# Altium PCB Multi-sensor Datalogger.PcbDoc
Units mm, origin at the board's own origin, x right, y up, seen from the top; angles counter-clockwise.
Board outline 100.58 x 93.85 mm, 2 copper layers (Top Layer, Bottom Layer); 51 components, 45 nets, 209 pads, 49 vias.
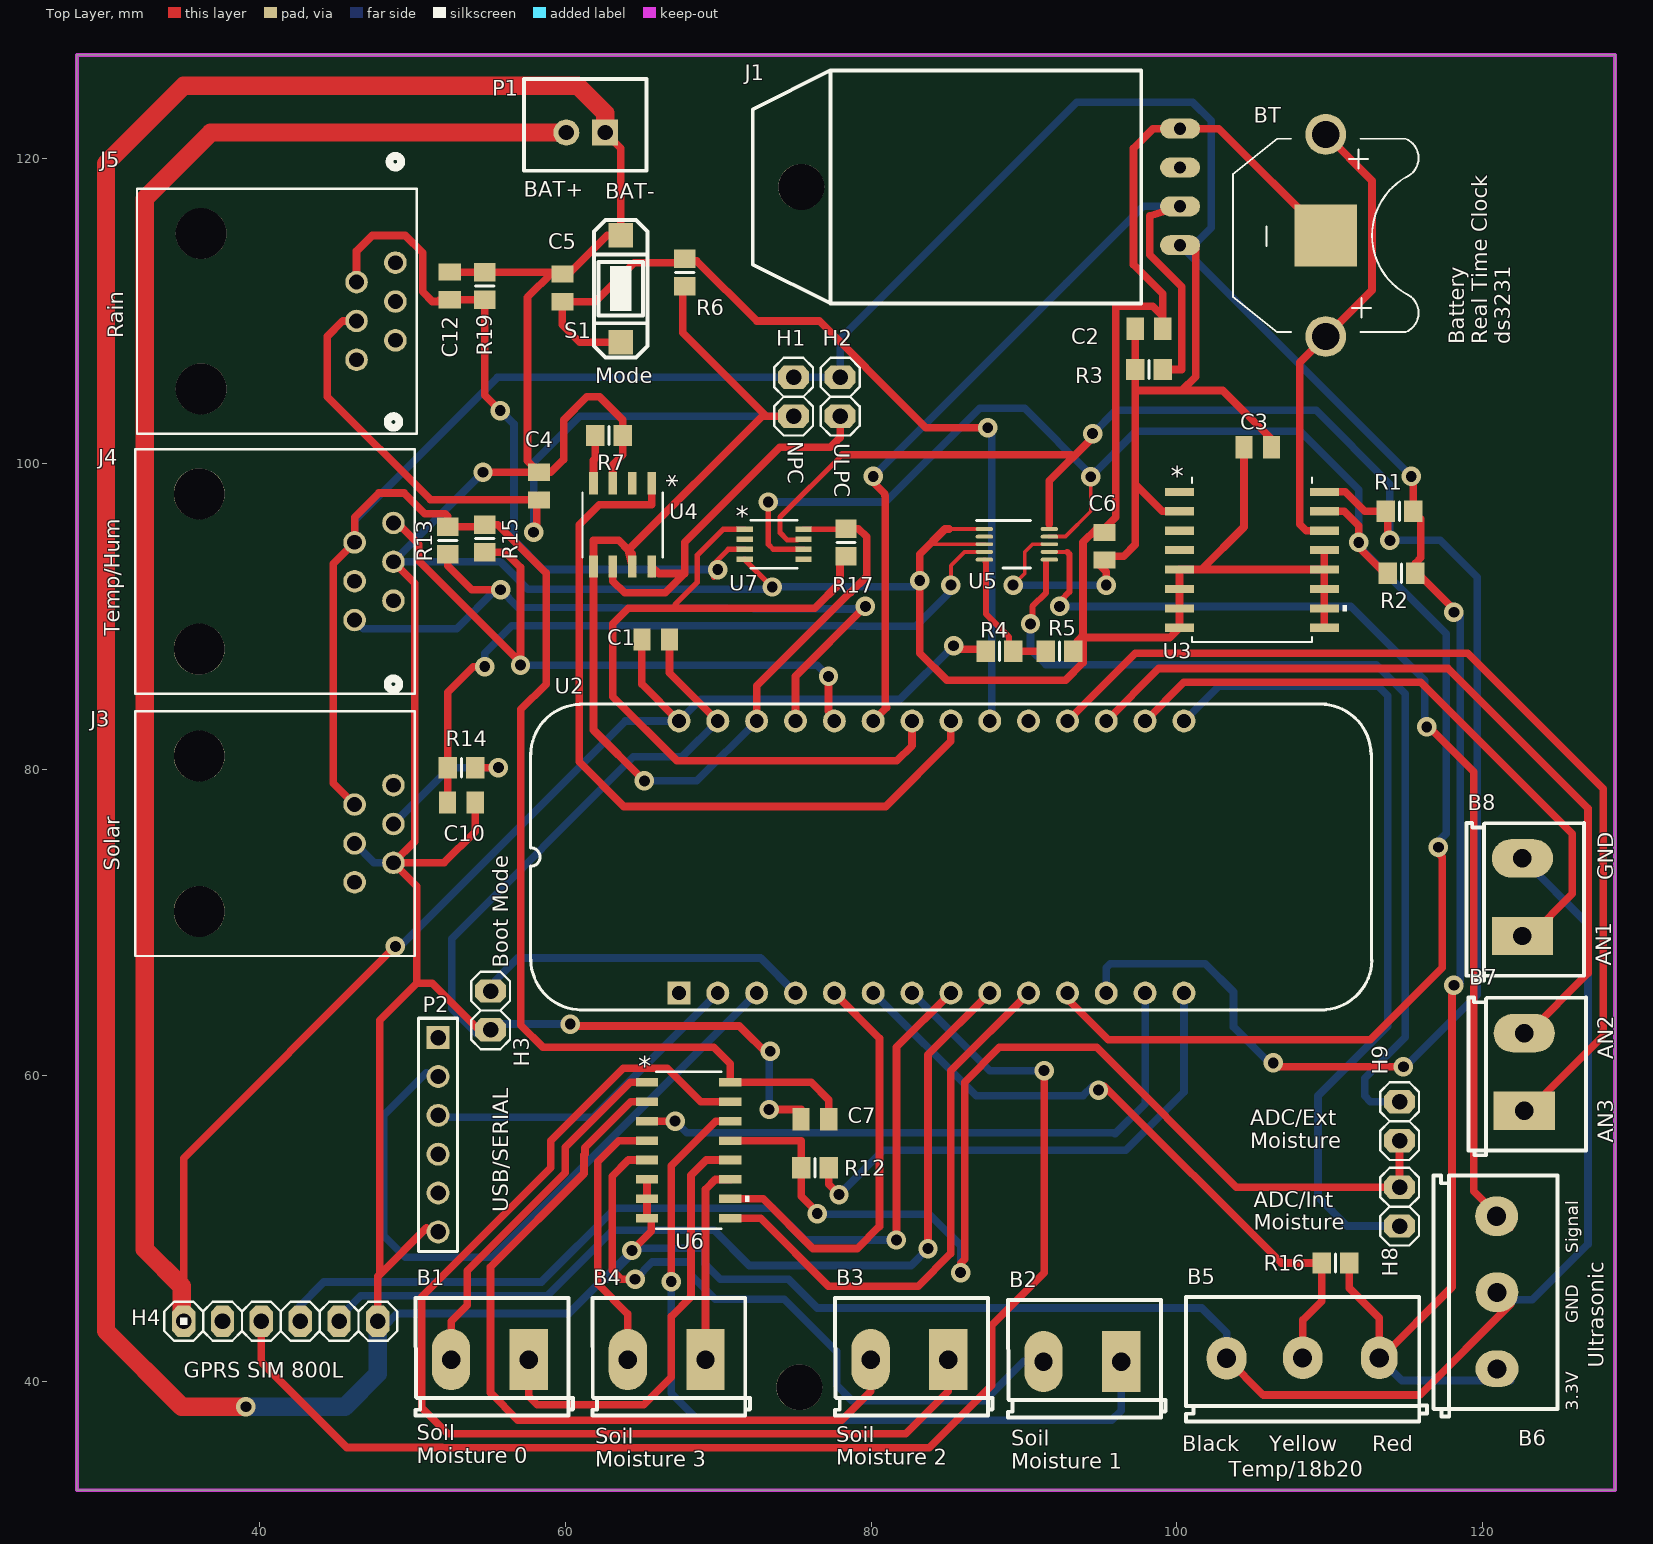
[diagram p0: Top Layer view]
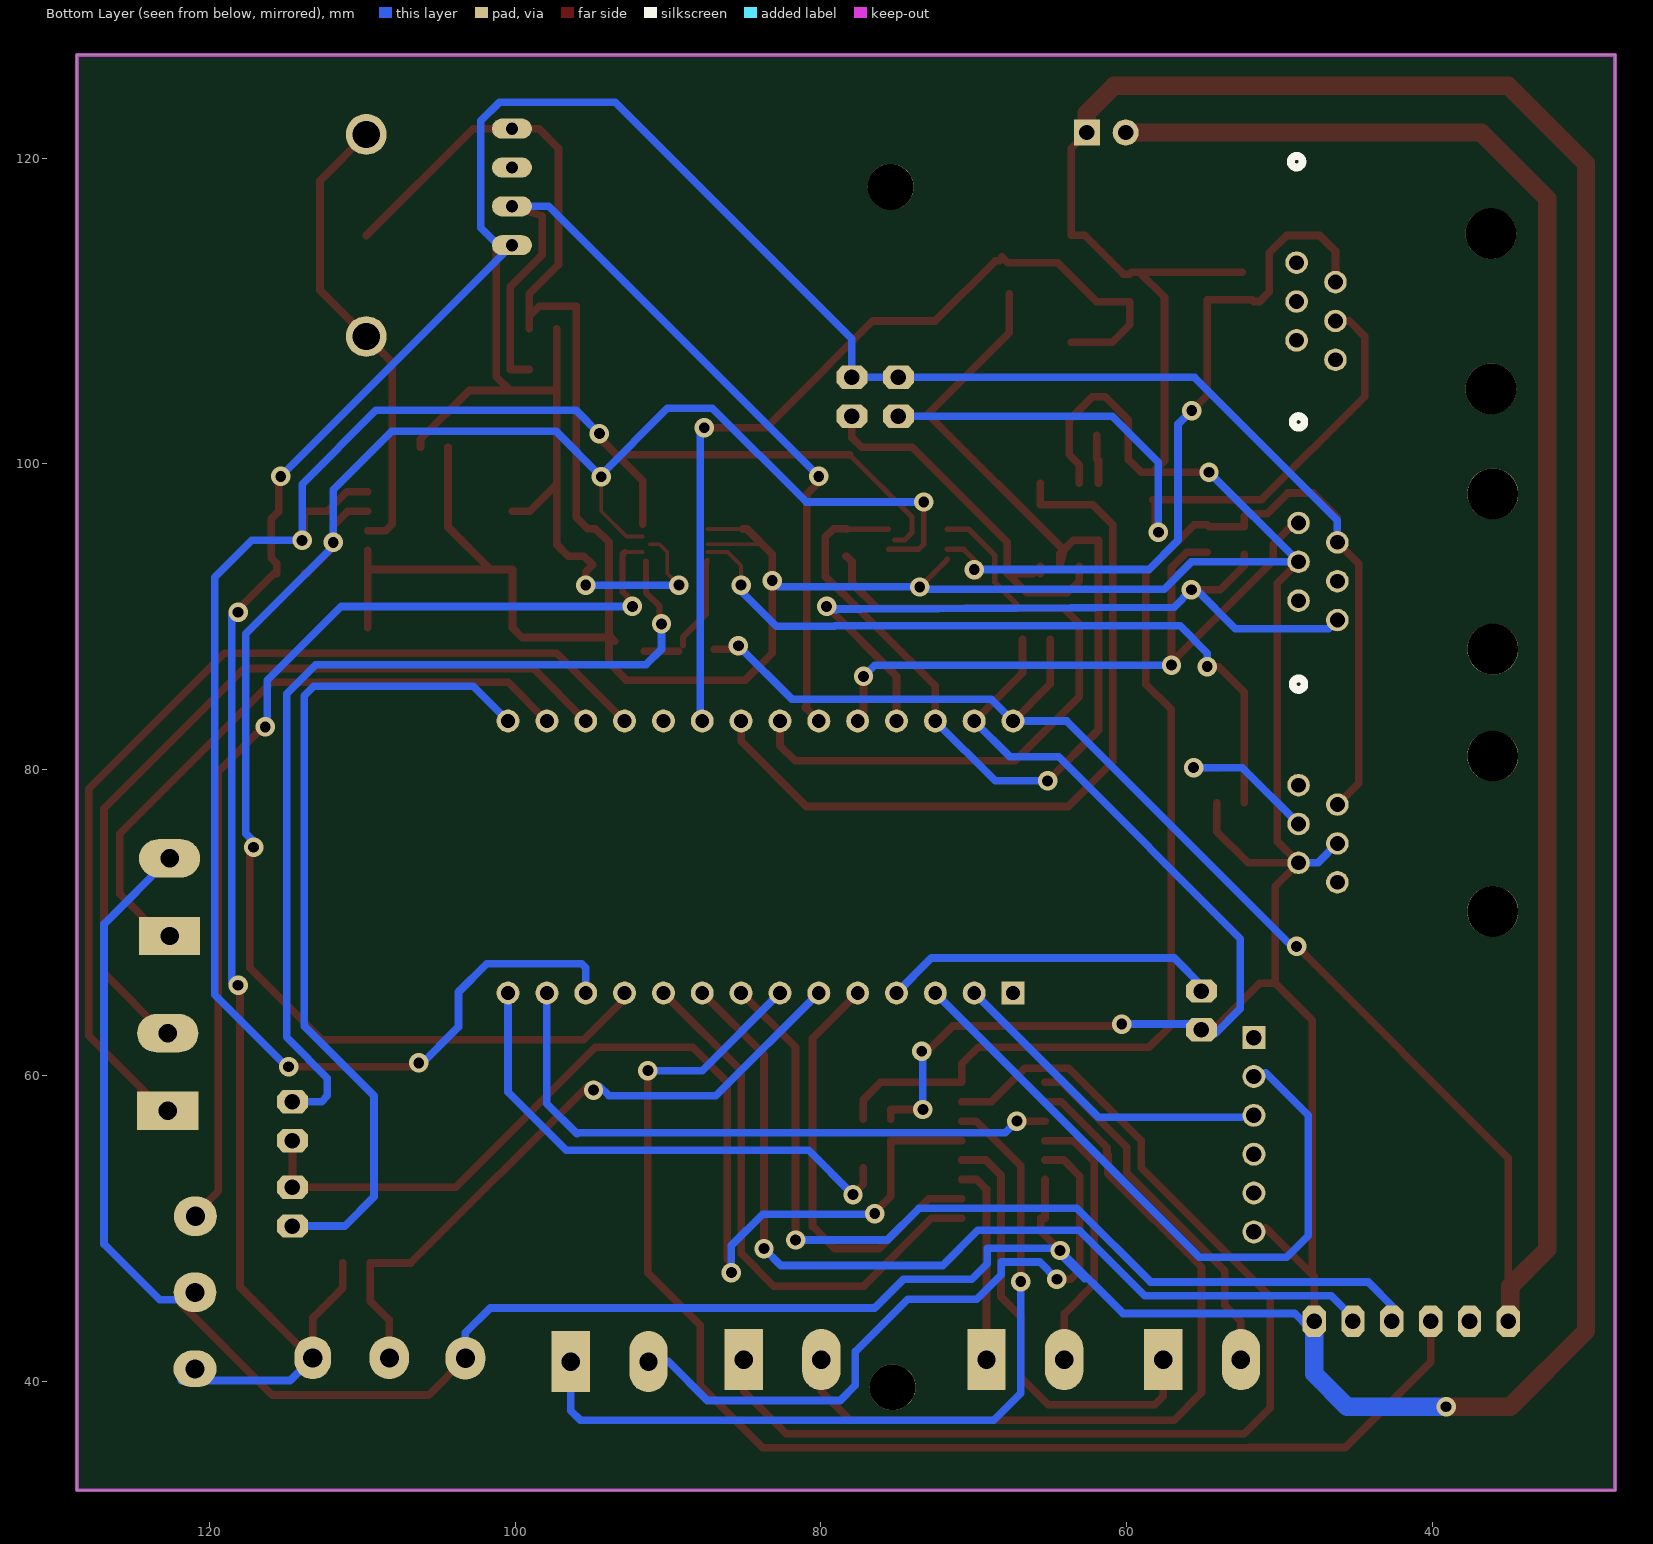
[diagram p1: Bottom Layer view, seen from below]

## Layer stack, top to bottom
Top Solder: solder mask 0.0102, Solder Resist, Dk 3.5
Top Layer: signal copper 0.0356
Dielectric 1: dielectric 0.32, FR-4, Dk 4.8
Bottom Layer: signal copper 0.0356
Bottom Solder: solder mask 0.0102, Solder Resist, Dk 3.5

## Board outline
28.067,32.893 28.067,126.746 128.651,126.746 128.651,32.893

## Design rules (kind name [scope] priority, off if disabled: settings)
Clearance [All] p1: gap=0.4 except(0.7: Arc-Poly Track-Poly SMDPad-Poly THPad-Poly Via-Poly Fill-Poly Poly-Poly)
PolygonConnect [All] p1: connectstyle=Relief reliefconductorwidth=0.254 reliefentries=4 polygonreliefangle="90 Angle" airgapwidth=0.254
RoutingVias [All] p1: holewidth=0.711 width=1.27 viastyle="Through Hole" minholewidth=0.711 minwidth=1.27 maxholewidth=0.711 maxwidth=1.27
SolderMaskExpansion [All] p1: expansion=0.102
Width [All] p1: maxlimit=1.2 minlimit=0.25 preferedwidth=0.5 minimp=50.000000 maximp=50.000000 favimp=50.000000
30 further rules are at their usual default settings.

## Classes and differential pairs
component class "Multi-sensor Datalogger": BT C1 C2 C3 C4 C5 C6 C7 H1 H2 H3 H4 H8 H9 J1 P1 P2 R1 R2 R3 R4 R5 R6 R7 R12 R17 S1 U2 U3 U4 U5 U6 U7
component class Connectors: B1 B2 B3 B4 B5 B6 B7 B8 C10 C12 J3 J4 J5 R13 R14 R15 R16 R19

## Components (designator, comment, footprint, x,y, rotation, side; value= is the part's Value field where it differs from the comment)
B1 "Borne" BORNE2 55.118,41.402 r180 top
B2 "Borne" BORNE2 93.853,41.275 r180 top
B3 "Borne" BORNE2 82.55,41.402 r180 top
B4 "Borne" BORNE2 66.675,41.402 r180 top
B5 "Borne 3" BORNE3 113.284,41.275 r180 top
B6 "Borne 3" BORNE3 120.65,40.767 r90 top
B7 "Borne" BORNE2 122.682,60.198 r90 top
B8 "Borne" BORNE2 122.555,71.628 r90 top
BT "BK-5091" BAT_BK-5091 109.728,114.935 r270 top
C1 "08055C104KAT2A" CAP_X7R_0805_AVX 65.913,88.519 r180 top
C2 "08055C104KAT2A" CAP_X7R_0805_AVX 98.171,108.839 r180 top
C3 "08055C104KAT2A" CAP_X7R_0805_AVX 105.283,101.092 r0 top
C4 "08055C104KAT2A" CAP_X7R_0805_AVX 58.293,98.552 r90 top
C5 "08055C104KAT2A" CAP_X7R_0805_AVX 59.817,111.506 r270 top
C6 "08055C104KAT2A" CAP_X7R_0805_AVX 95.25,94.615 r270 top
C7 "08055C104KAT2A" CAP_X7R_0805_AVX 76.327,57.15 r0 top
C10 "" CAP_X7R_0805_AVX 53.213,77.851 r0 top
C12 "" CAP_X7R_0805_AVX 52.451,111.633 r270 top
H1 "Header" "Header 1X2" 74.93,103.124 r90 top
H2 "Header" "Header 1X2" 77.978,103.124 r90 top
H3 "Header" "Header 1X2" 55.118,62.992 r90 top
H4 "Header 6" "Header 1X6" 42.672,43.942 r180 top
H8 "Header" "Header 1X2" 114.554,50.165 r90 top
H9 "Header" "Header 1X2" 114.554,58.293 r270 top
J1 "DHT22" DHT22 100.203,118.11 r90 top
J3 "RJ11-6N-B" CONN_RJ11-6N-B_TEC 48.768,78.994 r270 top
J4 "RJ11-6N-B" CONN_RJ11-6N-B_TEC 48.768,96.139 r270 top
J5 "RJ11-6N-B" CONN_RJ11-6N-B_TEC 48.895,113.157 r270 top
P1 "Header 2" BORNERA25-2 62.611,121.666 r180 top
P2 "Header 6" HDR1X6 51.689,62.484 r270 top
R1 "Res1" 6-0805_N 114.554,96.901 r180 top
R2 "Res2" 6-0805_N 114.681,92.837 r180 top
R3 "Res3" 6-0805_N 98.171,106.172 r180 top
R4 "Res4" 6-0805_N 88.392,87.757 r0 top
R5 "Res5" 6-0805_N 92.329,87.757 r0 top
R6 "Res1" 6-0805_N 67.818,112.522 r90 top
R7 "" 6-0805_N 62.865,101.854 r180 top
R12 "Res3" 6-0805_N 76.327,53.975 r0 top
R13 "Res" 6-0805_N 52.324,94.996 r270 top
R14 "Res" 6-0805_N 53.213,80.137 r180 top
R15 "Res" 6-0805_N 54.737,95.123 r270 top
R16 "Res" 6-0805_N 110.363,47.752 r180 top
R17 "Res3" 6-0805_N 78.359,94.869 r270 top
R19 "Res" 6-0805_N 54.737,111.633 r90 top
S1 "SW-PB" BUTTON-1-SMD 63.627,107.696 r180 top
U2 "LoPy" LoPy 83.947,74.295 r0 top
U3 "ds3231s#" 21-0042B_16_MXM 104.902,93.726 r0 top
U4 "MIC2545A-2YM-TR" SOP-8_MCH 63.754,96.012 r270 top
U5 "ADS1115IDGSR" DGS0010A_L 89.535,94.742 r0 top
U6 "CD74HC4052MG4" D16_TEX 68.072,55.118 r0 top
U7 "S-35770E01I-K8T2U" TMSOP08_2P9X2P8_ABL 73.66,94.742 r0 top

## Footprints (in the part's own frame and the unit in brackets; to place one, negate y for a bottom-side part, rotate by r counter-clockwise, add the part's x,y. Pads: shape width x height; smd on the part's side, far side on the other; paste and mask are expansions set on the pad)
6-0805_N [mm] "Chip Resistor, Body 2.0x1.2mm, IPC Medium Density"
  rect 1.2x1.4 smd: 1(-0.9,0) 2(0.9,0)
  silkscreen extent 0,-0.6 0,0.6, body extent -1.07,-0.7 1.07,0.7, height 0.7
21-0042B_16_MXM [mil]
  rect 74x21 smd paste+0 mask+0: 1(-186.5,175) 2(-186.5,125) 3(-186.5,75) 4(-186.5,25) 5(-186.5,-25) 6(-186.5,-75) 7(-186.5,-125) 8(-186.5,-175) 9(186.5,-175) 10(186.5,-125) 11(186.5,-75) 12(186.5,-25) 13(186.5,25) 14(186.5,75) 15(186.5,125) 16(186.5,175)
  silkscreen extent -154,-212 244,212, body extent -209,-210 209,203, height 104
BAT_BK-5091 [mm]
  round 2.67 hole 1.78: 1+(-6.605,0) 2+(6.605,0)
  rect 4.06x4.06 smd: NEG(0,0)
  silkscreen extent -6.33,-6.07 6.33,6.07, body extent -9.63,-6.99 9.37,5.59, height 3.22
BORNE2 [mm] "Terminal atornillable 2 salidas"
  rect 2.5x4 hole 1.2: 1(-2.501,-0.028)
  oval 2.5x4 hole 1.2: 2(2.579,-0.028)
  silkscreen extent -5.4,-4.06 4.9,3.62, body extent -5.51,-3.97 4.99,3.73, height 10
BORNE3 [mm] "Terminal atornillable 3 salidas"
  oval 2.4x2.8 hole 1.25: 1(0.06,-0.275)
  oval 2.6x2.8 hole 1.25: 2(5.065,-0.275) 3(10.04,-0.25)
  silkscreen extent -3.06,-4.24 12.7,3.89, body extent -2.45,-4.28 12.55,3.72, height 10
BORNERA25-2 [mm]
  rect 1.7x1.7 hole 1: 1(0,0)
  round 1.7 hole 1: 2(2.54,0)
  silkscreen extent -2.7,-3.5 5.3,2.5, body extent -1.29,-3.22 3.79,2.62, height 10.1
BUTTON-1-SMD [mm]
  rect 1.6x1.6 smd: 1(0,-0.25) 2(0,-7.25)
  silkscreen extent -1.75,-8.25 1.75,0.75, body extent -1.8,-7.75 1.8,0.25, height 2.5
CAP_X7R_0805_AVX [mil]
  rect 44x57 smd paste+0 mask+0: 1(-35.5,0) 2(35.5,0)
  body extent -44,-29 44,29, height 37
CONN_RJ11-6N-B_TEC [mil]
  round 58 hole 38 mask+0: 1(0,0) 2(50,-100) 3(100,0) 4(150,-100) 5(200,0) 6(250,-100)
  round 131 hole 131 unplated: 7(-75,-500) 8(325,-500)
  silkscreen extent -275,-665 440,55, body extent -183,-600 433,49, height 613
D16_TEX [mil]
  rect 57.5x22 smd paste+0 mask+0: 1(-107.25,175) 2(-107.25,125) 3(-107.25,75) 4(-107.25,25) 5(-107.25,-25) 6(-107.25,-75) 7(-107.25,-125) 8(-107.25,-175) 9(107.25,-175) 10(107.25,-125) 11(107.25,-75) 12(107.25,-25) 13(107.25,25) 14(107.25,75) 15(107.25,125) 16(107.25,175)
  silkscreen extent -84,-202 156,202, body extent -122,-197 122,197, height 69
DGS0010A_L [mm]
  oval 1.15x0.25 smd paste+0 mask+0.051: 1(-2.125,1) 2(-2.125,0.5) 3(-2.125,0) 4(-2.125,-0.5) 5(-2.125,-1) 6(2.125,-1) 7(2.125,-0.5) 8(2.125,0) 9(2.125,0.5) 10(2.125,1)
  silkscreen extent -2.65,-1.55 0.9,1.55, body extent -2.46,-1.5 2.46,1.5, height 0.41
DHT22 [mm]
  oval 1.308x2.616 hole 0.8: DATA(-1.27,0) GND(3.81,0) NC(1.27,0) VDD(-3.81,0)
  round 3 hole 3 unplated: ""(0,24.765)
  silkscreen extent -7.62,2.54 7.62,27.94, body extent -7.73,-0.57 7.37,29.78, height 7.73
HDR1X6 [mm] "Connector; Header; 6 Position"
  rect 1.5x1.5 hole 1: 1(0,0)
  round 1.5 hole 1: 2(2.54,0) 3(5.08,0) 4(7.62,0) 5(10.16,0) 6(12.7,0)
  silkscreen extent -1.27,-1.27 13.97,1.27
"Header 1X2" [mil] "Conector Header 1 linea 2 terminales"
  oct 60x80 hole 40: 1(0,0) 2(100,0)
  silkscreen extent -50,-50 150,50, body extent -50,-49 150,49, height 341
"Header 1X6" [mil] "Conector Header 1 linea 6 terminales"
  oct 60x80 hole 40: 1(-200,0) 2(-100,0) 3(0,0) 4(100,0) 5(200,0) 6(300,0)
  silkscreen extent -250,-50 350,50, body extent -250,-48 350,50, height 344
LoPy [mm] "DIP, Plastic; 28 Leads; Row Spacing 15.24 mm; Pitch 2.54 mm"
  rect 1.5x1.5 hole 0.9: 1(-16.51,-8.89)
  round 1.5 hole 0.9: 2(-13.97,-8.89) 3(-11.43,-8.89) 4(-8.89,-8.89) 5(-6.35,-8.89) 6(-3.81,-8.89) 7(-1.27,-8.89) 8(1.27,-8.89) 9(3.81,-8.89) 10(6.35,-8.89) 11(8.89,-8.89) 12(11.43,-8.89) 13(13.97,-8.89) 14(16.51,-8.89) 15(16.51,8.89) 16(13.97,8.89) 17(11.43,8.89) 18(8.89,8.89) 19(6.35,8.89) 20(3.81,8.89) 21(1.27,8.89) 22(-1.27,8.89) 23(-3.81,8.89) 24(-6.35,8.89) 25(-8.89,8.89) 26(-11.43,8.89) 27(-13.97,8.89) 28(-16.51,8.89)
  silkscreen extent -26.21,-10 28.8,10, body extent -26.61,-10.03 28.64,10.29, height 6.2
SOP-8_MCH [mil]
  rect 57.5x22 smd paste+0 mask+0: 1(-107.25,75) 2(-107.25,25) 3(-107.25,-25) 4(-107.25,-75) 5(107.25,-75) 6(107.25,-25) 7(107.25,25) 8(107.25,75)
  silkscreen extent -84,-104 84,104, body extent -117,-98 127,99, height 69
TMSOP08_2P9X2P8_ABL [mil]
  rect 41.5x14 smd paste+0 mask+0: 1(-75.75,38.39) 2(-75.75,12.8) 3(-75.75,-12.8) 4(-75.75,-38.39) 5(75.75,-38.39) 6(75.75,-12.8) 7(75.75,12.8) 8(75.75,38.39)
  silkscreen extent -60,-62 60,62, body extent -83,-55 83,59, height 32

## Part data
B1 B2 B3 B4 B7 B8: library part Borne2, "Terminal Atornillable 2 salidas"
B5 B6: library part Borne3, "Terminal atornillable 3 salidas"
BT: "Battery Retainer Coin, 11.6mm 1 Cell PC Pin"
C1 C2 C3 C4 C5 C6 C7 J3 J4 J5 U3 U4 U5 U6 U7: "No Description Available"
C10 C12: library part "Capacitor ceramico", "Capacitor ceramico"
H1 H2 H3 H8 H9: library part "Header 2", "Header 2 pin"
H4 P2: "Header, 6-Pin"
J1: "Capacitive-type humidity and temperature module/sensor"
P1: "Header, 2-Pin"
R1 R6: "Resistor"
R2 R3 R4 R5 R7 R12 R17: library part Res1, "Resistor"
R13 R14 R15 R16 R19: library part "Resistor 1/4 watt", "Resistor empaque ceramico axial de 1/4 de watt"
S1: "Switch"
U2: "LoPy, Wifi and Bluetooth Microcontroller, 4M RAM, 4 MHz, 28-Pin, 3.0 to 5.5V Supply Range, Commercial Temperature"

## Free pads (board coordinates)
  round 3 hole 3: 2(75.311,39.624)

## Via types
v1: diameter 1.27, hole 0.711, Top Layer to Bottom Layer, 49 vias

## Nets (pads, with @x,y where several pads share a name; then routed paths per layer and width w, separated by ;. In a path a pad name is that pad's centre, name@x,y a point inside that pad or via, vN(x,y) a via of type N, cw(c..) or ccw(c..) an arc to the next point about the centre after c; other vN are vias at no path point)
3.3V: C4.1 H1.1 J5.4 R6.1 R17.1 U2.26 U4.5 U4.7 U7.8 | length 123.2
  Top Layer w0.35: U7.8 R17.1@78.307,95.717
  Top Layer w0.5: J5.4 45.466,109.347 44.45,108.331 44.45,104.394 51.194,97.65 C4.1@58.141,97.65 ; v1(57.937,95.529) 58.141,95.733 C4.1@58.141,97.65 ; C4.1 C4.1@58.141,97.65 ; v1(65.176,79.273) 61.849,82.601 U4.5 61.849,94.996 63.5,94.996 64.127,94.369 ; R6.1@67.691,111.125 67.691,108.585 73.152,103.124 72.883,103.124 ; U2.26 72.517,85.488 78.607,91.578 78.65,91.578 79.709,92.637 79.709,95.225 79.165,95.769 R17.1 R17.1@78.307,95.717 ; H1.1 72.883,103.124 ; 64.127,94.369 64.389,94.107 U4.7 64.127,94.369 ; 64.127,94.369 72.883,103.124
  Bottom Layer w0.5: v1(57.937,95.529) 57.937,100.101 60.96,103.124 H1.1 ; v1(65.176,79.273) 68.605,79.273 U2.26
"3.3V OUT MIC2545": H2.1 U4.6 U4.8 | length 25.7
  Top Layer w0.5: U4.6 63.119,92.329 63.881,91.567 66.548,91.567 67.818,92.837 ; U4.8@65.659,92.837 U4.8 66.11,92.837 67.818,92.837 ; H2.1 77.978,101.727 77.75,101.499 77.747,101.499 77.34,101.092 74.041,101.092 67.818,94.869 67.818,92.837
"3.3V SENSORS": B5.1 B6.1 C2.2 C3.2 C6.2 C7.2 H1.2 H2.2 J1.VDD J3.2 J4.2 R1.1 R2.1 R3.2 R13.1 R15.1 R16.1 U3.2 U5.8 U6.16 | length 323
  Top Layer w0.25: v1(89.281,92.075) 90.043,92.837 90.043,94.234 90.551,94.742 U5.8@91.186,94.742
  Top Layer w0.5: J3.2 44.831,79.121 44.831,93.472 J4.2 46.228,96.52 47.803,98.095 49.476,98.095 50.821,96.75 52.144,96.75 52.324,96.571 R13.1 54.61,95.896 R15.1 55.59,96.023 58.75,92.862 58.75,85.598 57.099,83.947 57.099,63.297 58.547,61.849 69.723,61.849 70.796,60.776 U6.16 76.073,59.563 77.229,58.407 C7.2 ; v1(95.377,92.075) 95.377,92.951 94.932,93.396 95.504,93.967 96.507,93.967 97.271,94.731 97.271,98.679 ; C2.2 97.269,107.494 97.271,107.493 R3.2 97.271,104.8 ; U3.2 99.049,96.901 97.271,98.679 ; J1.VDD 101.219,114.3 101.219,105.689 100.33,104.8 ; C3.2 106.185,101.6 102.984,104.8 100.33,104.8 ; R16.1 111.263,46.115 113.224,44.154 B5.1 113.224,41.423 117.983,46.182 v1@117.983,65.913 ; v1@115.443,98.806 115.443,96.89 R1.1 115.951,96.404 115.951,93.853 115.581,93.483 R2.1 115.747,92.837 v1@118.364,90.22 ; 97.271,98.679 97.271,104.8 ; 97.271,104.8 100.33,104.8
  Bottom Layer w0.5: J4.2 46.228,96.317 55.575,105.664 H1.2 H2.2 77.978,108.174 93.452,123.647 101.016,123.647 102.235,122.428 102.235,115.443 101.092,114.3 J1.VDD v1(115.316,99.187) ; v1(89.281,92.075) 95.123,92.075 95.25,92.202 v1(95.377,92.075) ; B5.1 114.709,40.065 B6.1@121.814,40.065 ; v1@118.364,65.913 118.517,66.066 118.517,90.067 v1@118.364,90.22
  other v1: 118.11,65.913 118.11,90.297
ADC_EXTERNAL: H9.1 U5.6 | length 61.9
  Top Layer w0.4: v1@90.551,89.281 90.551,90.678 91.44,91.567 91.44,93.599
  Bottom Layer w0.5: v1(90.424,89.535) 90.424,87.884 91.44,86.868 113.03,86.868 114.935,84.963 114.935,62.523 113.523,61.111 113.523,61.072 112.268,59.817 112.268,58.674 112.649,58.293 H9.1
ADC_I1: B8.1 U2.16 | length 40.9
  Top Layer w0.5: U2.16 100.457,85.725 115.951,85.725 125.857,75.819 125.857,71.893 B8.1@123.091,69.127
ADC_I2: B7.2 U2.17 | length 53
  Top Layer w0.5: U2.17 98.817,86.625 117.718,86.625 126.873,77.47 126.873,66.686 B7.2@122.964,62.777
ADC_I3: B7.1 U2.18 | length 63.6
  Top Layer w0.5: U2.18 97.282,87.63 118.999,87.63 127.874,78.755 127.874,62.607 B7.1@122.964,57.697
ADC_INTERNAL: H8.1 U2.15 | length 55.3
  Bottom Layer w0.5: U2.15 102.743,85.471 113.154,85.471 113.792,84.833 113.792,63.246 109.22,58.674 109.22,52.07 111.125,50.165 H8.1
ANALOG_HRXL-MAXSONAR: B6.3 U5.7 | length 68.9
  Top Layer w0.25: U5.7 92.829,94.242
  Top Layer w0.4: v1@92.392,90.361 92.392,91.059 92.964,91.63 92.964,94.107 92.829,94.242
  Top Layer w0.5: v1(116.332,82.804) 116.332,82.931 119.395,79.868 119.395,52.439 B6.3@121.789,50.045
  Bottom Layer w0.5: v1(92.329,90.678) 111.368,90.678 116.205,85.841 116.205,83.439
BATTERY_LEVEL: R4.2 R5.1 U5.5 | length 8.5
  Top Layer w0.25: 87.41,93.565 U5.5
  Top Layer w0.4: 87.503,93.565 87.503,90.201 89.027,88.677 R4.2@89.027,88.138
  Top Layer w0.5: R4.2 R5.1@91.556,87.757
DHT22_SIGNAL: J1.DATA R3.1 U2.23 | length 58.3
  Top Layer w0.5: U2.23 81.026,84.074 80.914,84.186 80.914,97.902 80.899,97.917 80.899,98.044 v1@80.137,98.806 ; v1(80.137,99.187) v1@80.391,98.933 ; R3.1 100.305,106.172 100.305,111.582 98.222,113.665 98.222,116.205 J1.DATA
  Bottom Layer w0.5: v1(80.137,99.187) 92.773,111.823 97.79,116.84 J1.DATA
FILT_RAD_SOLAR: C10.1 R14.2 U5.4 | length 47.7
  Top Layer w0.25: v1(85.217,92.075) 85.217,93.345 86.114,94.242 U5.4
  Top Layer w0.5: C10.1 52.311,78.969 52.313,78.97 R14.2 52.313,85.079 53.975,86.741 v1(54.737,86.741)
  Bottom Layer w0.5: v1(54.737,86.741) 54.737,87.63 56.515,89.408 79.082,89.408 79.097,89.393 82.916,89.393 85.471,91.948 v1@85.471,92.075
GND: B5.3 B6.2 B8.2 BT.NEG C1.1 C2.1 C3.1 C4.2 C5.1 C6.1 C7.1 C10.2 C12.1 H3.1 H4.1 J1.GND J3.4 J3.5 J4.3 P1.1 P2.6 R5.2 R7.1 R19.2 S1.2 U2.27 U3.5 U3.6 U3.7 U3.8 U3.9 U3.10 U3.11 U3.12 U3.13 U4.3 U5.1 U5.3 U6.6 U6.7 U6.8 U7.4 | length 616.4
  Top Layer w0.25: 83.947,94.742 U5.3 ; 85.09,95.742 U5.1
  Top Layer w0.35: U7.4 71.736,93.745 v1(73.533,91.948)
  Top Layer w0.5: H4.1 47.752,46.863 47.879,46.99 ; J4.3 50.165,92.202 50.165,75.311 J3.5 ; 50.927,50.038 47.879,46.99 ; C12.1 53.264,112.535 53.265,112.533 R19.2 59.692,112.533 C5.1 60.211,112.408 62.749,114.946 S1.2 63.627,120.65 P1.1 ; C10.2 54.115,75.959 52.07,73.914 J3.5 ; v1(54.623,99.454) C4.2 ; H3.1 54.356,62.992 51.308,66.04 50.292,66.04 ; C5.1@59.182,112.533 57.531,110.882 57.531,100.216 C4.2 ; v1@60.452,63.246 71.374,63.246 v1@73.33,61.29 ; U4.3 63.119,99.949 63.765,100.595 R7.1 63.765,102.87 62.241,104.394 61.417,104.394 59.893,102.87 59.893,100.292 59.055,99.454 C4.2 ; v1(64.364,48.565) 65.634,49.835 65.634,50.673 U6.8 U6.7 U6.6 ; C1.1 66.815,86.347 U2.27 ; v1(73.33,57.785) 75.425,57.785 C7.1 ; 85.09,95.742 84.831,95.742 83.185,94.096 v1(83.185,92.373) 83.185,87.63 84.963,85.852 92.71,85.852 93.853,86.995 93.853,94.869 94.755,95.771 95.25,95.771 95.987,96.507 95.987,110.312 98.425,110.312 99.073,109.664 ; R5.2@93.472,88.392 93.726,88.646 99.53,88.646 U3.8 U3.7 U3.6 U3.5 101.6,93.091 ; C2.1 99.073,109.664 ; B5.3 105.653,39.116 115.86,39.116 B6.2@121.814,45.07 ; C3.1 104.381,95.872 101.6,93.091 ; U3.9 U3.10 U3.11 U3.12 ; U3.13 U3.12 ; BT.NEG 102.743,121.92 J1.GND 98.431,121.92 97.161,120.65 97.161,113.03 99.073,111.118 99.073,109.664 ; 47.879,46.99 47.879,63.627 50.292,66.04 ; J3.5 50.292,72.39 50.292,66.04 ; 101.6,93.091 U3.12
  Top Layer w1.2: v1(39.116,38.354) 34.925,38.354 29.972,43.307 29.972,119.634 35.052,124.714 60.833,124.714 62.611,122.936 P1.1
  Bottom Layer w0.5: J3.4 47.498,73.914 J3.5 ; H4.1@48.133,43.561 49.022,44.45 60.249,44.45 v1(64.364,48.565) ; v1(54.623,99.454) J4.3 55.767,93.599 57.56,91.806 73.391,91.806 v1(73.533,91.948) 73.548,91.963 82.775,91.963 v1(83.185,92.373) 83.185,92.163 v1@83.072,92.05 ; v1(60.325,63.373) 55.499,63.373 H3.1 54.483,62.992 54.229,62.738 52.578,64.389 52.578,68.961 64.46,80.843 67.635,80.843 U2.27 ; 62.535,46.736 62.762,46.736 64.744,48.718 69.114,48.718 69.114,47.698 70.127,46.685 74.6,46.685 76.479,44.806 101.618,44.806 103.244,43.18 B5.3 ; v1(73.33,57.785) v1@73.33,61.29 ; B6.2@120.777,45.339 123.226,45.339 126.873,48.986 126.873,69.917 B8.2
  Bottom Layer w1.2: v1(39.116,38.354) 45.593,38.354 47.752,40.513 H4.1
  other v1: 73.406,61.595
"MODE BUTTOM": C5.2 R6.2 S1.1 U2.20 | length 58.6
  Top Layer w0.5: S1.1@63.631,107.95 S1.1 60.964,107.946 59.817,109.093 C5.2 61.963,110.604 64.516,113.157 67.793,113.157 R6.2@68.174,113.538 ; R6.2@68.326,113.284 68.58,113.284 72.517,109.347 76.611,109.347 79.644,106.314 79.644,106.284 83.566,102.362 v1(87.63,102.362)
  Bottom Layer w0.5: v1(87.63,102.362) 87.895,102.097 87.895,83.185 U2.20
NetBT_1+: BT.1+ BT.2+ U3.14 | length 30.5
  Top Layer w0.5: U3.14 108.458,95.631 108.026,96.063 108.026,106.628 BT.2+ 112.753,111.355 112.753,118.515 BT.1+
NetR7_2: R7.2 U4.4 | length 3.2
  Top Layer w0.5: U4.4 61.849,100.228 61.965,100.344 R7.2
OUT/IN_X: H8.2 H9.2 R12.1 U6.13 | length 70.9
  Top Layer w0.5: U6.13 75.427,55.753 R12.1 75.427,52.117 v1@76.744,50.8 ; v1(85.852,47.117) 85.852,47.735 86.117,48 86.117,59.574 88.392,61.849 94.742,61.849 103.886,52.705 H8.2 H9.2
  Bottom Layer w0.5: v1(76.479,50.978) 76.52,50.937 83.81,50.937 85.852,48.895 v1(85.852,47.117)
P2: H3.2 U2.4 | length 21.8
  Bottom Layer w0.5: H3.2@54.991,65.786 56.896,67.691 72.771,67.691 U2.4
P3: U2.5 U6.10 | length 28.2
  Top Layer w0.5: U6.10 72.953,51.943 76.2,48.696 79.103,48.696 80.547,50.14 80.547,62.455 U2.5
P8: U2.10 U6.9 | length 36.3
  Top Layer w0.5: U6.9 72.771,50.673 77.216,46.228 83.072,46.228 85.217,48.373 85.217,60.325 U2.10
P11: U2.13 U6.3 | length 40.9
  Top Layer w0.5: U6.3 v1(67.183,57.023)
  Bottom Layer w0.5: v1(67.183,57.023) 67.945,56.261 95.885,56.261 ; 95.948,56.197 97.917,58.166 U2.13
P12: R12.2 U2.14 | length 33.8
  Top Layer w0.5: R12.2 77.227,52.897 v1(77.902,52.222)
  Bottom Layer w0.5: v1(77.902,52.222) 80.797,55.118 96.647,55.118 100.457,58.928 U2.14
P19: U2.21 U4.1 | length 50.8
  Top Layer w0.5: U4.1 65.659,97.333 62.23,97.333 60.909,96.012 60.909,80.518 63.83,77.597 80.95,77.597 85.217,81.864 U2.21
PLUVIOMETER: C12.2 J5.2 R19.1 U7.3 | length 48.1
  Top Layer w0.35: v1@69.723,92.583 69.723,93.472 70.668,94.417 U7.3
  Top Layer w0.5: J5.2 46.355,113.919 47.371,114.935 49.53,114.935 50.673,113.792 50.673,111.252 51.308,110.617 51.702,110.617 51.816,110.731 53.264,110.731 53.265,110.733 R19.1 54.737,104.496 v1(55.753,103.48)
  Bottom Layer w0.5: v1@55.753,103.505 56.652,102.606 56.652,94.997 58.559,93.091 v1(69.977,93.091)
RAD_SOLAR: J3.3 R14.1 | length 9.9
  Top Layer w0.5: R14.1 v1(55.626,80.137)
  Bottom Layer w0.5: J3.3 52.451,80.137 v1(55.626,80.137)
RESETGPRS: H4.4 U2.7 | length 87
  Top Layer w0.5: H4.4 40.132,41.275 45.72,35.687 51.94,35.687 51.953,35.674 83.807,35.674 87.884,39.751 87.884,43.688 91.313,47.117 v1(91.313,60.325)
  Bottom Layer w0.5: U2.7 87.757,60.325 v1@91.186,60.325
RESETRAIN: R17.2 U2.22 U7.1 | length 53.6
  Top Layer w0.35: 67.183,90.805 68.643,92.265 68.643,94.043 70.317,95.717 U7.1
  Top Layer w0.5: R17.2 78.322,93.969 77.968,93.615 77.968,92.212 76.307,90.551 64.135,90.551 63.119,89.535 63.119,84.769 67.31,80.578 81.67,80.578 82.677,81.585 U2.22
RXD_CONVERTER: P2.2 U2.3 | length 43.9
  Bottom Layer w0.5: 50.927,60.198 48.133,57.404 48.133,49.53 49.53,48.133 55.245,48.133 U2.3
RXD_GPRS: H4.3 U2.8 | length 60.5
  Top Layer w0.5: v1(81.658,49.255) 81.658,61.846 U2.8
  Bottom Layer w0.5: H4.3@42.545,44.577 42.545,44.831 44.222,46.508 58.446,46.508 63.271,51.333 73.584,51.333 75.663,49.255 v1(81.658,49.255)
SCL: R1.2 U2.12 U3.16 U5.10 U7.7 | length 128.9
  Top Layer w0.35: U7.7@75.184,95.028 74.517,95.028 74.041,95.504 74.041,96.52 78.12,100.599
  Top Layer w0.5: 78.12,100.599 93.076,100.599 93.218,100.457 ; 91.66,96.046 91.66,98.899 94.488,101.727 v1(94.488,101.981) ; v1@106.299,60.579 v1@114.935,60.579 ; U3.16 110.998,98.171 112.268,96.901 R1.2 113.792,96.763 113.792,94.996 v1(113.919,94.996)
  Bottom Layer w0.5: v1(94.488,101.981) 96.012,103.505 109.093,103.505 113.919,98.679 v1(113.919,94.996) 117.221,94.996 119.634,92.583 119.634,65.278 v1@114.935,60.579 ; U2.12 95.377,67.056 95.631,67.31 101.854,67.31 103.695,65.468 103.695,63.182 v1@106.299,60.579
  other v1: 114.808,60.579 106.299,60.833
SCL_TEMP: J4.6 R13.2 U2.25 | length 49.3
  Top Layer w0.5: R13.2 52.324,93.345 53.899,91.77 v1(55.778,91.77) ; U2.25 75.057,86.106 v1(79.629,90.678)
  Bottom Layer w0.5: J4.6 46.787,89.23 52.908,89.23 v1@55.499,91.821 ; v1(55.778,91.77) 56.901,90.634 77.41,90.512 78.934,90.512 79.022,90.424 79.276,90.678 v1(79.629,90.678)
SDA: R2.2 U2.11 U3.15 U5.9 U7.6 | length 125.2
  Top Layer w0.25: U5.9 92.702,95.242 94.361,96.901 v1(94.361,99.162)
  Top Layer w0.35: v1(73.279,97.511) 73.279,94.742 73.604,94.417 U7.6
  Top Layer w0.5: U2.11 92.837,65.027 95.507,62.357 112.649,62.357 117.348,67.056 117.348,74.295 v1@116.84,74.803 ; U3.15 110.947,96.901 111.887,95.961 v1(111.887,94.869) 111.887,94.539 113.589,92.837 R2.2
  Bottom Layer w0.5: v1(73.279,97.511) 80.961,97.511 87.098,103.647 88.162,103.647 88.177,103.632 90.043,103.632 v1@94.437,99.238 ; v1(94.361,99.162) v1@94.437,99.238 ; v1(117.094,74.93) 117.094,75.311 117.617,75.834 117.617,88.885 111.887,94.615 v1(111.887,94.869) 111.887,98.298 108.062,102.123 97.322,102.123 v1@94.437,99.238
SDA_TEMP: J4.1 R15.2 U2.24 | length 45.4
  Top Layer w0.5: J4.1@49.149,96.012 50.419,94.742 50.419,93.675 v1@57.163,86.931 ; R15.2 56.083,94.223 57.074,93.232 v1(57.074,86.843) ; v1(77.216,86.106) 77.216,83.82 77.724,83.312 U2.24
  Bottom Layer w0.5: v1(57.074,86.843) 76.479,86.843 v1(77.216,86.106) v1@77.216,86.36
TEMP_18B20: B5.2 R16.2 U2.6 | length 44.1
  Top Layer w0.5: v1(94.869,59.055) 94.996,59.055 95.25,59.309 106.807,47.752 R16.2 109.463,45.262 108.219,44.018 B5.2
  Bottom Layer w0.5: U2.6 86.868,58.674 93.853,58.674 94.488,59.309 94.742,59.055 v1(94.869,59.055)
TXD_CONVERTER: P2.3 U2.2 | length 21.7
  Bottom Layer w0.5: P2.3@51.689,57.277 61.849,57.277 U2.2
TXD_GPRS: H4.2 U2.9 | length 60.8
  Top Layer w0.5: v1(83.718,48.692) 83.718,61.366 U2.9
  Bottom Layer w0.5: H4.2@45.085,44.069 46.624,45.608 58.819,45.608 63.096,49.886 69.735,49.886 72.036,47.585 82.611,47.585 v1(83.718,48.692)
VCC: C1.2 H4.6 P1.2 R4.1 U2.28 | length 184.4
  Top Layer w0.5: H4.6@34.925,44.577 35.052,44.45 H4.6 ; 35.052,46.101 35.052,54.61 v1(48.895,68.453) ; C1.2 65.011,85.611 U2.28 ; v1(85.395,88.113) 85.689,88.113 85.917,87.884 R4.1@86.984,87.884
  Top Layer w1.2: H4.6@34.925,44.577 34.925,46.228 32.512,48.641 32.512,117.348 36.83,121.666 P1.2
  Bottom Layer w0.5: v1@49.073,68.326 63.932,83.185 U2.28 68.859,84.607 81.89,84.607 v1(85.395,88.113)
Z0_A: B1.1 U6.12 | length 29.4
  Top Layer w0.5: B1.1 57.619,39.028 58.166,38.481 65.126,38.481 66.929,40.284 66.929,44.247 68.224,45.542 68.224,53.492 69.215,54.483 U6.12
Z0_B: B1.2 U6.1 | length 24.1
  Top Layer w0.5: B1.2 52.539,43.942 53.594,44.997 53.594,47.241 59.998,53.645 59.998,55.318 64.243,59.563 U6.1
Z1_A: B2.1 U6.14 | length 53.6
  Top Layer w0.5: v1(66.929,46.533) 66.929,54.102 69.85,57.023 U6.14
  Bottom Layer w0.5: v1(66.929,46.533) 66.929,39.243 68.707,37.465 95.719,37.465 96.354,38.1 B2.1
Z1_B: B2.2 U6.5 | length 44.4
  Top Layer w0.5: v1(64.567,46.685) 63.652,46.685 63.068,47.269 63.068,53.416 64.135,54.483 U6.5
  Bottom Layer w0.5: v1(64.567,46.685) 65.699,47.818 68.214,47.818 68.214,46.99 69.814,45.39 74.32,45.39 77.749,41.961 77.749,39.751 78.74,38.76 87.427,38.76 89.992,41.326 91.274,41.326 B2.2
Z2_A: B3.1 U6.15 | length 73.9
  Top Layer w0.5: U6.15 68.859,58.293 66.66,60.492 63.794,60.492 59.055,55.753 59.055,53.975 50.622,45.542 50.622,38.278 52.326,36.574 82.255,36.574 85.051,39.37 B3.1
Z2_B: B3.2 U6.2 | length 52.3
  Top Layer w0.5: U6.2 64.287,58.293 61.29,55.296 61.29,54.88 61.227,54.816 61.227,53.601 55.118,47.492 55.118,39.257 56.901,37.474 78.075,37.474 79.971,39.37 B3.2
Z3_A: B4.1 U6.11 | length 13
  Top Layer w0.5: B4.1 69.176,52.564 69.825,53.213 U6.11
Z3_B: B4.2 U6.4 | length 17.6
  Top Layer w0.5: B4.2 64.096,44.41 62.127,46.38 62.127,54.38 63.5,55.753 U6.4
pads on no net: H4.5 J1. J1.NC J3.1 J3.6 J3.7 J3.8 J4.4 J4.5 J4.7 J4.8 J5.1 J5.3 J5.5 J5.6 J5.7 J5.8 P2.1 P2.4 P2.5 U2.1 U2.19 U3.1 U3.3 U3.4 U4.2 U5.2 U7.2 U7.5

## Keep-outs
Keep-Out Layer:
  the board outline again, w0.254

## Silkscreen, mask and mechanical layers (free items; w line width, h text height)
Top Overlay:
  text "BAT+" at 57.277,117.475 h1
  text "BAT-" at 62.611,117.348 h1
  text "Rain" at 31.115,108.204 h1 r90
  text "Battery  / Real Time Clock  / ds3231" at 121.793,107.823 h1 r90
  text "Mode" at 61.976,105.283 h1
  text "NPC" at 74.549,101.473 h1 r270
  text "ULPC" at 77.605,101.357 h1 r270
  text "Temp/Hum" at 30.861,88.773 h1 r90
  text "Solar" at 30.861,73.406 h1 r90
  text "GND" at 128.524,72.771 h1 r90
  text "AN1" at 128.397,67.183 h1 r90
  text "Boot Mode" at 56.261,67.056 h1 r90
  text "AN2" at 128.524,61.087 h1 r90
  text "AN3" at 128.524,55.626 h1 r90
  text "ADC/Ext  / Moisture" at 104.775,55.245 h1
  text "USB/SERIAL" at 56.261,51.054 h1 r90
  text "ADC/Int  / Moisture" at 105.029,49.911 h1
  text "Signal" at 126.238,48.387 h0.8 r90
  text "GND" at 126.238,43.815 h0.8 r90
  text "Ultrasonic" at 127.889,40.894 h1 r90
  text "GPRS SIM 800L" at 35.052,40.259 h1
  text "3.3V" at 126.238,38.1 h0.8 r90
  text "Black" at 100.33,35.433 h1
  text "Yellow" at 106.045,35.433 h1
  text "Red" at 112.776,35.433 h1
  text "Soil / Moisture 0" at 50.292,34.671 h1
  text "Soil / Moisture 2" at 77.724,34.544 h1
  text "Soil / Moisture 3" at 61.976,34.417 h1
  text "Soil / Moisture 1" at 89.154,34.29 h1
  text "Temp/18b20" at 103.378,33.782 h1

## Text inside footprints (layer, text, board x,y; h text height)
U3: Top Overlay "*" at 99.593,98.577 h1.27; Mechanical 13 "*" at 101.168,97.625 h1.27
U4: Top Overlay "*" at 66.091,99.308 h1.27 r270; Mechanical 13 "*" at 64.91,97.942 h1.27 r270
U6: Top Overlay "*" at 64.776,59.995 h1.27; Mechanical 13 "*" at 66.142,58.776 h1.27
U7: Top Overlay "*" at 71.164,95.946 h1.27; Mechanical 13 "*" at 72.326,94.844 h1.27